# Altium PCB EQF1248.PcbDoc
Units mil, origin at the board's own origin, x right, y up, seen from the top; angles counter-clockwise.
Board outline 2495 x 4497 mil, 2 copper layers (Top Layer, Bottom Layer); 93 components, 63 nets, 321 pads, 60 vias.
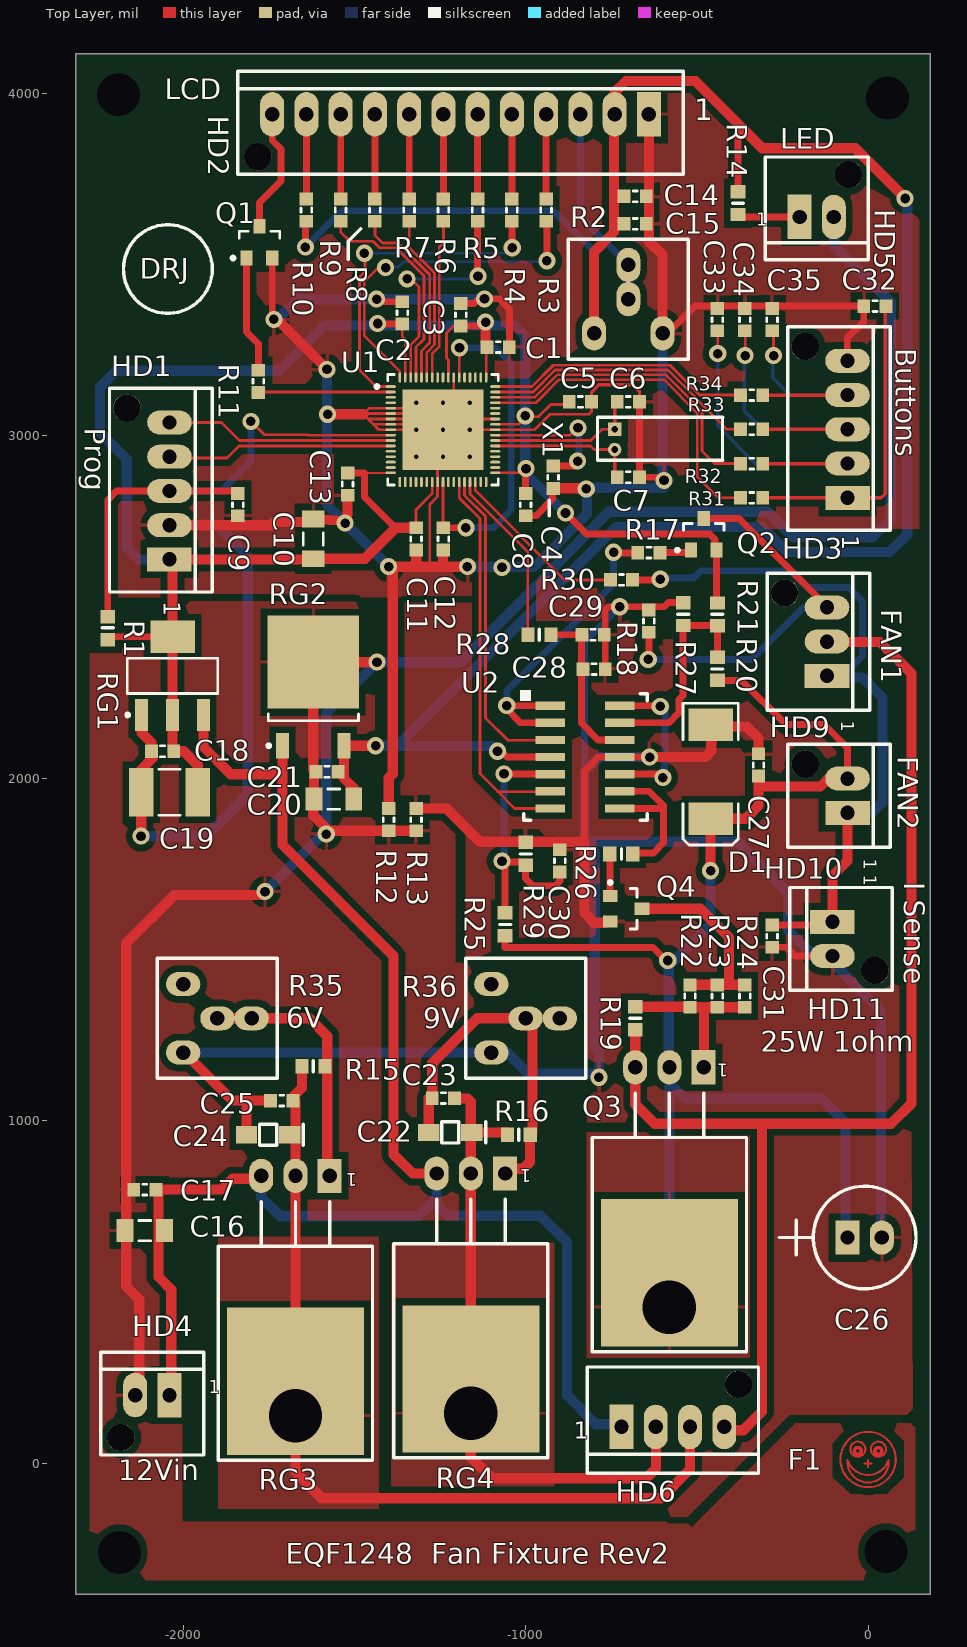
[diagram p0: Top Layer view]
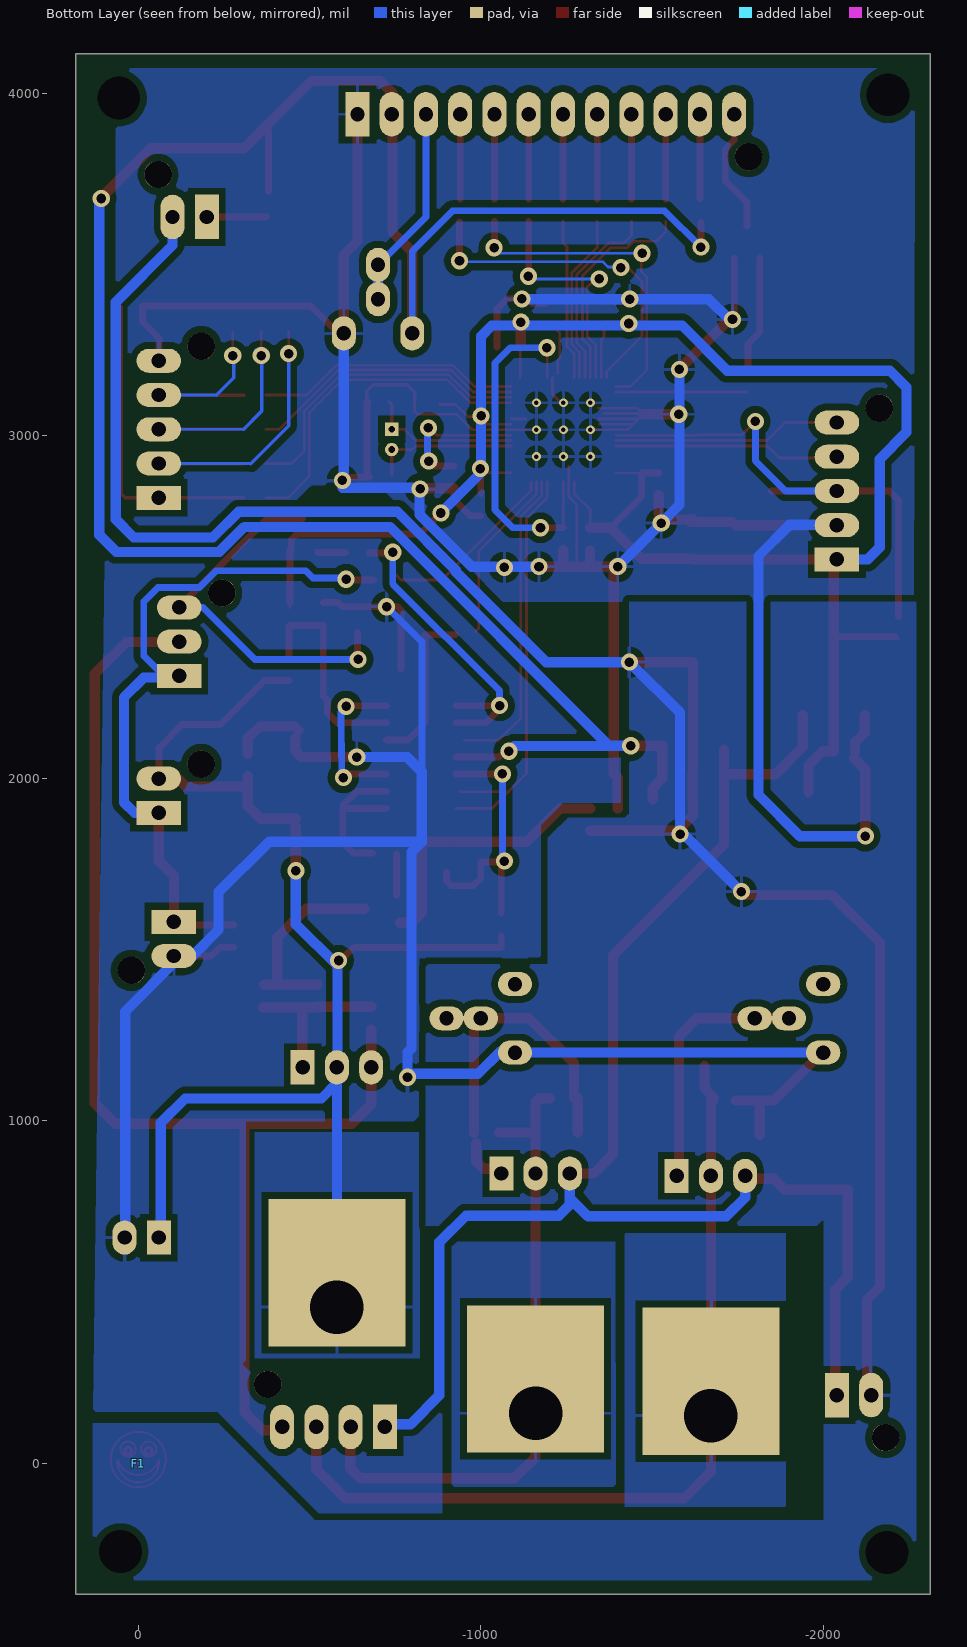
[diagram p1: Bottom Layer view, seen from below]

## Layer stack, top to bottom
Top Layer: signal copper 1.4
Dielectric: dielectric 12.6, FR-4, Dk 4.8
Bottom Layer: signal copper 1.4

## Board outline
-2313,4115 -2313,-382 182,-382 182,4115

## Design rules (kind name [scope] priority, off if disabled: settings)
Clearance [InNamedPolygon('TIP32') Or  InNamedPolygon('Fan_GND_Top') Or  InNamedPolygon('BottomGND') Or  InNamedPolygon('BottomCGND') Or  InNamedPolygon('TIP32Bottom') Or  InNamedPolygon('Bottom9V') Or  InNamedPolygon('Fan_GND_Bottom') Or  InNamedPolygon('Bottom6V') Or  InNamedPolygon('TopGND') Or  InNamedPolygon('TopCGND') Or  InNamedPolygon('Top9V') Or  InNamedPolygon('Top6V')] p1: gap=20
Clearance "Poly Clearance" [InNamedPolygon('TopFGND') Or  InNamedPolygon('Bottom6V') Or  InNamedPolygon('Bottom9V') Or  InNamedPolygon('TopGND') Or  InNamedPolygon('BottomCGND') Or  InNamedPolygon('TopCGND') Or  InNamedPolygon('BottomGND') Or  InNamedPolygon('Top6V') Or  InNamedPolygon('Top9V') Or  InNamedPolygon('BottomFGND')] p2: gap=15
Clearance Clearance_U1 [(InComponent('U1'))] p3: gap=6
Clearance "Clearance All" [All] p4: gap=6
HoleSize [All] p1: absolutevalues=TRUE maxlimit=160 minlimit=1 maxpercent=80.000 minpercent=20.000
PlaneConnect [All] p1: planeconnectstyle=Direct reliefexpansion=20 reliefentries=4 reliefconductorwidth=10 reliefairgap=10
PolygonConnect [All] p1: connectstyle=Relief reliefconductorwidth=10 reliefentries=4 polygonreliefangle="90 Angle"
RoomDefinition U_FanControl [InComponentClass('U_FanControl')] p1 off: confinementstyle=ConfineIn formatcopy=TRUE lockcomponents=FALSE outline -5320,-881 -3320,-881 -3320,119 -5320,119
RoomDefinition "U_Display Buttons" [InComponentClass('U_Display Buttons')] p2 off: confinementstyle=ConfineIn formatcopy=TRUE lockcomponents=FALSE outline -5320,-881 -3320,-881 -3320,119 -5320,119
RoomDefinition U_Cypress [InComponentClass('U_Cypress')] p3 off: confinementstyle=ConfineIn formatcopy=TRUE lockcomponents=FALSE outline -5320,-881 -3320,-881 -3320,119 -5320,119
RoutingVias [All] p1: holewidth=28 width=50 viastyle="Through Hole" minholewidth=28 minwidth=50 maxholewidth=28 maxwidth=50
SilkToSilkClearance [All] p1: silktosilkclearance=2
SilkscreenOverComponentPads [All] p1: minsilkscreentomaskgap=2
SolderMaskExpansion [All] p1: expansion=4
Width [All] p1: maxlimit=80 minlimit=6 preferedwidth=8 toplayer_maxwidth=50 bottomlayer_minwidth=8 minimp=50.000000 maximp=50.000000 favimp=50.000000
24 further rules are at their usual default settings.

## Classes and differential pairs
component class U_Cypress: C1 C2 C3 C4 C5 C6 C7 C8 C9 C10 C11 C12 C13 F1 HD1 R1 U1 X1
component class "U_Display Buttons": C14 C15 C32 C33 C34 C35 HD2 HD3 Q1 R2 R3 R4 R5 R6 R7 R8 R9 R10 R11 R12 R13 R31 R32 R33 R34
component class U_FanControl: C6 C16 C17 C18 C19 C20 C21 C22 C23 C24 C25 C27 C28 C29 C30 C31 D1 HD4 HD5 HD6 HD9 HD10 HD11 Q2 Q3 Q4 R14 R15 R16 R17 R18 R19 R20 R21 R22 R23 R24 R25 R26 R27 R28 R29 R30 R35 R36 RG1 RG2 RG3 RG4 U2

## Components (designator, comment, footprint, x,y, rotation, side; value= is the part's Value field where it differs from the comment)
C1 "CAP_NON_POLAR_SMT" 0603 -1080,3259 r0 top
C2 "CAP_NON_POLAR_SMT" 0603 -1360,3359 r90 top
C3 "CAP_NON_POLAR_SMT" 0603 -1189,3353.48 r90 top
C4 "1.0uF_0603_16V" 0603 -920,2879 r270 top
C5 "CAP_NON_POLAR_SMT" 0603 -840,3099 r0 top
C6 "22pF_0603" 0603 -700,3099 r0 top
C7 "22pF_0603" 0603 -700,2879 r0 top
C8 "CAP_NON_POLAR_SMT" 0603 -1000,2799 r270 top
C9 "CAP_NON_POLAR_SMT" 0603 -1840,2799 r270 top
C10 "CAP_NON_POLAR_SMT" 1206 -1620,2699 r90 top
C11 "CAP_NON_POLAR_SMT" 0603 -1320,2699 r270 top
C12 "1.0uF_0603_16V" 0603 -1240,2699 r270 top
C13 "CAP_NON_POLAR_SMT" 0603 -1520,2859 r270 top
C14 "CAP_NON_POLAR_SMT" 0603 -680,3699 r0 top
C15 "1.0uF_0603_16V" 0603 -680,3619 r0 top
C16 "CAP_NON_POLAR_SMT" 1206 -2112,679 r180 top
C17 "CAP_NON_POLAR_SMT" 0603 -2112,799 r180 top
C18 "CAP_NON_POLAR_SMT" 0603 -2060,2079 r180 top
C19 "CAP_NON_POLAR_SMT" 1812 -2040,1959 r180 top
C20 "CAP_NON_POLAR_SMT" 1206 -1560,1939 r180 top
C21 "CAP_NON_POLAR_SMT" 0603 -1580,2019 r180 top
C22 "10UF_TANT_16V" EIA3216-18 -1220,966 r180 top
C23 "CAP_NON_POLAR_SMT" 0603 -1240,1066 r180 top
C24 "10UF_TANT_16V" EIA3216-18 -1752,959 r180 top
C25 "CAP_NON_POLAR_SMT" 0603 -1712,1059 r180 top
C26 "100UF_RP_35V_100" CAP_100RP42 -60,659 r0 top
C27 "CAP_NON_POLAR_SMT" 0603 -320,2039 r90 top
C28 "CAP_NON_POLAR_SMT" 0603 -800,2319 r0 top
C29 "1.0uF_0603_16V" 0603 -803,2419 r0 top
C30 "CAP_NON_POLAR_SMT" 0603 -900,1759 r90 top
C31 "1.0uF_0603_16V" 0603 -280,1539 r270 top
C32 "CAP_NON_POLAR_SMT" 0603 20,3379 r180 top
C33 "CAP_NON_POLAR_SMT" 0603 -440,3339 r90 top
C34 "CAP_NON_POLAR_SMT" 0603 -360,3339 r90 top
C35 "CAP_NON_POLAR_SMT" 0603 -280,3339 r90 top
D1 "1N4001" DSO-C2/X3.3 -460,2019 r270 top
F1 "FIDUCIAL_SMILEY" FIDUCIAL_SMILEY 0,-1 r180 bottom
HD1 "HDR5PIN100SHRD" HDR5PIN100SHRD -2040,2639 r90 top
HD2 "HDR12PIN100SHRD" HDR12PIN100SHRD -640,3939 r180 top
HD3 "HDR5PIN100SHRD" HDR5PIN100SHRD -60,2819 r90 top
HD4 "HDR2PIN100SHRD" HDR2PIN100SHRD -2040,199 r180 top
HD5 "HDR2PIN100SHRD" HDR2PIN100SHRD -200,3639 r0 top
HD6 "HDR4PIN100SHRD" HDR4PIN100SHRD -720,106 r0 top
HD9 "HDR3PIN100SHRD" HDR3PIN100SHRD -120,2299 r90 top
HD10 "HDR2PIN100SHRD" HDR2PIN100SHRD -60,1899 r90 top
HD11 "HDR2PIN100SHRD" HDR2PIN100SHRD -104,1581 r270 top
Q1 "NPN_TRANSISTOR" SOT23-3 -1814.8,3519 r90 top
Q2 "PNP_TRANSISTOR" SOT23-3 -517.4,2666.09 r90 top
Q3 "TIP32" TO-220-NORMAL -480,1156 r180 top
Q4 "2N4401_SOT23" SOT23-3 -752.91,1656.4 r0 top
R1 "R0603REFLOW_5%_1/8WATT" RC0603REFLOW-IPC -2220,2439 r270 top
R2 "POT 6MM 10K" "6MM POT" -800,3299 r0 top
R3 "Resistor_0603_5%" 0603 -940,3659 r90 top
R4 "Resistor_0603_5%" 0603 -1040,3659 r90 top
R5 "Resistor_0603_5%" 0603 -1140,3659 r90 top
R6 "Resistor_0603_5%" 0603 -1240,3659 r90 top
R7 "Resistor_0603_5%" 0603 -1340,3659 r90 top
R8 "Resistor_0603_5%" 0603 -1440,3659 r90 top
R9 "Resistor_0603_5%" 0603 -1540,3659 r90 top
R10 "Resistor_0603_5%" 0603 -1640,3659 r90 top
R11 "Resistor_0603_5%" 0603 -1780,3159 r90 top
R12 "Resistor_0603_5%" 0603 -1400,1879 r90 top
R13 "Resistor_0603_5%" 0603 -1320,1879 r270 top
R14 "R0603REFLOW_5%" RC0603REFLOW-IPC -380,3679 r90 top
R15 "R0603REFLOW_5%" RC0603REFLOW-IPC -1620,1159 r0 top
R16 "R0603REFLOW_5%" RC0603REFLOW-IPC -1020,959 r0 top
R17 "Resistor_0603_5%" 0603 -640,2659 r0 top
R18 "Resistor_0603_5%" 0603 -640,2459 r90 top
R19 "R0603REFLOW_5%" RC0603REFLOW-IPC -680,1299 r90 top
R20 "R0603REFLOW_5%" RC0603REFLOW-IPC -440,2319 r90 top
R21 "R0603REFLOW_5%" RC0603REFLOW-IPC -440,2479 r270 top
R22 "Resistor_0603_1%" 0603 -520,1364 r90 top
R23 "Resistor_0603_1%" 0603 -440,1364 r90 top
R24 "Resistor_0603_1%" 0603 -360,1364 r90 top
R25 "R0603REFLOW_5%" RC0603REFLOW-IPC -1060,1573 r90 top
R26 "R0603REFLOW_5%" RC0603REFLOW-IPC -720,1779 r180 top
R27 "R0603REFLOW_5%" RC0603REFLOW-IPC -540,2479 r90 top
R28 "R0603REFLOW_5%" RC0603REFLOW-IPC -960,2419 r0 top
R29 "R0603REFLOW_5%" RC0603REFLOW-IPC -1000,1779 r90 top
R30 "Resistor_0603_5%" 0603 -720,2579 r0 top
R31 "Resistor_0603_5%" 0603 -340,2819 r0 top
R32 "Resistor_0603_5%" 0603 -340,2919 r0 top
R33 "Resistor_0603_5%" 0603 -340,3019 r0 top
R34 "Resistor_0603_5%" 0603 -340,3119 r0 top
R35 "POT 6MM 10K" "6MM POT" -2000,1399 r270 top
R36 "POT 6MM 10K" "6MM POT" -1100,1399 r270 top
RG1 "LM1117SPX-3.3_SOT223" SOT-223 -2031,2299 r90 top
RG2 "REGULATOR_DPAK" DPAK -1709.76,2094.91 r90 top
RG3 "LM1085_TO220" TO-220-NORMAL -1572,839 r180 top
RG4 "LM1085_TO220" TO-220-NORMAL -1060,846 r180 top
U1 "CY8C3246LTI-128 QFN68" QFN68_8x8-MD -1241.26,3017.74 r0 top
U2 "LM324_SOIC14" SOIC14REFLOW-IPC -825,2062 r270 top
X1 "32.768KHZ_CRYSTAL" .03_Small_Footprint_CRYSTAL -740,3019 r270 top

## Footprints (in the part's own frame and the unit in brackets; to place one, negate y for a bottom-side part, rotate by r counter-clockwise, add the part's x,y. Pads: shape width x height; smd on the part's side, far side on the other; paste and mask are expansions set on the pad)
"6MM POT" [mil]
  oval 70x100 hole 42: 1(0,0) 2(100,100) 3(100,200) 4(200,0)
  silkscreen extent -75,-75 275,275
0603 [mm] "Chip Resistor, 2-Leads, Body 1.6x0.8mm, IPC Medium Density"
  rect 0.95x1 smd: 1(-0.825,0) 2(0.825,0)
  silkscreen extent -0.15,-0.4 0.15,0.4
1206 [mm] "Chip Resistor, 2-Leads, Body 3.1x1.6mm, IPC Medium Density"
  rect 1.25x1.7 smd: 1(-1.475,0) 2(1.475,0)
  silkscreen extent -0.45,-0.75 0.45,0.75, body extent -1.63,-0.82 1.62,0.82, height 0.7
1812 [mm] "Chip Capacitor, 2-Leads, Body 4.5x3.2mm, IPC Low Density"
  rect 1.8x3.6 smd: 1(-2.1,0) 2(2.1,0)
  silkscreen extent -0.8,-1.7 0.8,1.7
.03_Small_Footprint_CRYSTAL [mm] "Small Footprint_ECS-.327-12.5-13"
  rect 1x1 hole 0.5: 1(0,0)
  round 1 hole 0.5: 2(1.5,0)
  silkscreen extent -0.89,-1.27 2.29,8, body extent -0.38,-0.35 1.71,7.67, height 2.1
CAP_100RP42 [mil]
  rect 70x100 hole 42: 1(0,0)
  oval 70x100 hole 42: 2(100,0)
  silkscreen extent -200,-150 200,150
DPAK [mm] "D-PAK, 3-Pads, Body 6.2x6.7mm (max), IPC Medium Density"
  rect 1.9x0.95 smd: 1(0,0) 3(0,-4.56)
  rect 6.9x6.8 smd: 4(6.2,-2.28)
  silkscreen extent -0.12,-5.63 2.35,1.15, body extent -0.42,-5.56 9.52,0.98, height 2.28
DSO-C2/X3.3 [mm] "DO-214-AB/SMC; 2 C-Bend Leads; Body 7.9 x 5.9 mm, inc. leads (LxW)"
  rect 2.4x3.3 smd: 1(-3.475,0) 2(3.475,0)
  silkscreen extent -5.07,-2.05 5.43,2.05
EIA3216-18 [mil]
  rect 62x50 smd: 1(-63,0) 2(63,0)
  silkscreen extent -103,-31 25,31
FIDUCIAL_SMILEY [mil]
  Bottom Layer circle w6: c-30,42 r22
  Bottom Layer circle w10: c-30,37 r10
  Bottom Layer circle w6: c30,42 r22
  Bottom Layer circle w10: c30,37 r10
  Bottom Layer circle w6: c0,12 r80.71
  Bottom Layer pour cut-out: -60,110 -105,65 -105,-40 -55,-90 50,-90 105,-40 105,60 55,110
  Bottom Layer lines w6: 10,0 -10,0 ; 0,-10 0,10 ; 60,10 cw(c0,30) -60,10 ccw(c0,5) 60,10
HDR2PIN100SHRD [mil]
  rect 70x130 hole 42: 1(0,0)
  oval 70x130 hole 42: 2(100,0)
  round 80 hole 80 unplated: 3(142,124)
  silkscreen extent -100,-125 200,175, body extent -92,-133 192,180, height 400
HDR3PIN100SHRD [mil]
  rect 70x130 hole 42: 1(0,0)
  oval 70x130 hole 42: 2(100,0) 3(200,0)
  round 80 hole 80 unplated: 4(242,124)
  silkscreen extent -100,-125 300,175, body extent -92,-138 292,175, height 400
HDR4PIN100SHRD [mil]
  rect 70x130 hole 42: 1(0,0)
  oval 70x130 hole 42: 2(100,0) 3(200,0) 4(300,0)
  round 80 hole 80 unplated: 5(342,124)
  silkscreen extent -100,-135 400,175, body extent -95,-138 390,175, height 400
HDR5PIN100SHRD [mil]
  rect 70x130 hole 42: 1(0,0)
  oval 70x130 hole 42: 2(100,0) 3(200,0) 4(300,0) 5(400,0)
  round 80 hole 80 unplated: 6(442,124)
  silkscreen extent -95,-125 500,175, body extent -92,-138 492,175, height 400
HDR12PIN100SHRD [mil]
  rect 70x130 hole 42: 1(0,0)
  oval 70x130 hole 42: 2(100,0) 3(200,0) 4(300,0) 5(400,0) 6(500,0) 7(600,0) 8(700,0) 9(800,0) 10(900,0) 11(1000,0) 12(1100,0)
  round 80 hole 80 unplated: 13(1142,124)
  silkscreen extent -100,-125 1200,175, body extent -92,-133 1192,180, height 400
QFN68_8x8-MD [mm] "QFN, 68-Leads, Body 8.1x8.1mm (max), Pitch 0.40mm, Medium Density"
  oval 0.75x0.2 smd: 1(-3.875,3.2) 2(-3.875,2.8) 3(-3.875,2.4) 4(-3.875,2) 5(-3.875,1.6) 6(-3.875,1.2) 7(-3.875,0.8) 8(-3.875,0.4) 9(-3.875,0) 10(-3.875,-0.4) 11(-3.875,-0.8) 12(-3.875,-1.2) 13(-3.875,-1.6) 14(-3.875,-2) 15(-3.875,-2.4) 16(-3.875,-2.8) 17(-3.875,-3.2) 35(3.875,-3.2) 36(3.875,-2.8) 37(3.875,-2.4) 38(3.875,-2) 39(3.875,-1.6) 40(3.875,-1.2) 41(3.875,-0.8) 42(3.875,-0.4) 43(3.875,0) 44(3.875,0.4) 45(3.875,0.8) 46(3.875,1.2) 47(3.875,1.6) 48(3.875,2) 49(3.875,2.4) 50(3.875,2.8) 51(3.875,3.2)
  oval 0.2x0.75 smd: 18(-3.2,-3.875) 19(-2.8,-3.875) 20(-2.4,-3.875) 21(-2,-3.875) 22(-1.6,-3.875) 23(-1.2,-3.875) 24(-0.8,-3.875) 25(-0.4,-3.875) 26(0,-3.875) 27(0.4,-3.875) 28(0.8,-3.875) 29(1.2,-3.875) 30(1.6,-3.875) 31(2,-3.875) 32(2.4,-3.875) 33(2.8,-3.875) 34(3.2,-3.875) 52(3.2,3.875) 53(2.8,3.875) 54(2.4,3.875) 55(2,3.875) 56(1.6,3.875) 57(1.2,3.875) 58(0.8,3.875) 59(0.4,3.875) 60(0,3.875) 61(-0.4,3.875) 62(-0.8,3.875) 63(-1.2,3.875) 64(-1.6,3.875) 65(-2,3.875) 66(-2.4,3.875) 67(-2.8,3.875) 68(-3.2,3.875)
  rect 2x2 smd paste-0.15 mask-0.15: 69(-2,-2) 69(-2,0) 69(-2,2) 69(0,-2) 69(0,0) 69(0,2) 69(2,-2) 69(2,0) 69(2,2)
  silkscreen extent -5.02,-4.1 4.1,4.1, body extent -4.05,-4.05 4.05,4.05, height 1
RC0603REFLOW-IPC [mil]
  rect 39x43 smd: 1(-33,0) 2(34,0)
  silkscreen extent 0,-16 0,16
SOIC14REFLOW-IPC [mil]
  rect 24x87 smd: 1(-150,-103) 2(-100,-103) 3(-50,-103) 4(0,-103) 5(50,-103) 6(100,-103) 7(150,-103) 8(150,100) 9(100,100) 10(50,100) 11(0,100) 12(-50,100) 13(-100,100) 14(-150,100)
  silkscreen extent -195,-190 185,180
SOT23-3 [mm] "SOT23, 3-Leads, Body 3.0x2.8mm (max), Pitch 0.95mm, IPC Medium Density"
  rect 1.1x0.9 smd: 1(0,0) 2(0,-1.9) 3(2.36,-0.95)
  silkscreen extent -0.12,-2.45 1.98,1.12, body extent 0.38,-2.47 1.98,0.57, height 1.4
SOT-223 [mm] "SOT223, 4-Leads, Body 6.7x7.3mm (max), Pitch 2.30mm, IPC Medium Density"
  rect 2.4x0.95 smd: 1(-2.9,2.3) 2(-2.9,0) 3(-2.9,-2.3)
  rect 2.4x3.3 smd: 4(2.9,0)
  silkscreen extent -3.02,-3.35 1.3,3.45, body extent -1.85,-3.35 1.85,3.35, height 1.8
TO-220-NORMAL [mil]
  rect 70x100 hole 42: 1(0,0)
  oval 70x100 hole 42: 2(100,0) 3(200,0)
  rect 400x430 hole 156 copper offset 0,-100: 4(100,700)
  silkscreen extent -125,75 325,830

## Part data
C1 C2 C3 C5 C8 C9 C11 C13 C14 C17 C18 C21 C23 C25 C27 C28 C30 C32 C33 C34 C35: library part 264790, "Capacitor, 0.1uF, 50V, Ceramic, X7R, +/- 20%, Non-Polar, 0603, Kemet: C0603C104M5RACTU or equivalent"
C4 C12 C15 C29 C31: library part 18838, "Capacitor, 1uF, 16V, Ceramic, X5R, +/- 10%, Non-Polar, 0603, 2, MURATA: GRM188R61C105KA93D OR EQUIVALENT"
C6 C7: library part 19574, "Capacitor, 22pF, 50, Ceramic, NPO, +/-5%, Non-Polar, 0603, 2, Kemet:C0603C220J5GACTU or equivalent"
C10 C16 C20: library part 265299, "Capacitor, 10uF, 50V, Ceramic, X5R, +/- 20%, Non-Polar, 1206, Taiyo Yuden: UMK316BBJ106ML-T or equivalent"
C19: library part 265012, "Capacitor, 1uF, 50V, Ceramic, Z5U, +/- 20%, Non-Polar, 1812, Kemet: C1812C105M5UACTU or equivalent"
C22 C24: library part 10669, "Capacitor, 10uF, 16V, Tantalum, General Purpose, +/- 20%, Polar, EIA 3216-18, KEMET: T491A106M016AS or Exact Equivalent"
C26: library part 3428, "Capacitor, 100uF, 35V, Electrolytic, +/- 20%, Radial, Polar, 0.1 in., Nichicon: UVR1V101MED or Equivalent"
D1: library part Diode, "Default Diode"
F1: library part 264290, "Fiducial, Smiley, PCB reference point, not a component"
HD1 HD3: library part 1770, "Header, 0.100 in., 5 pin Pins, Shrouded, AMP: 644486-5"
HD2: library part 1763, "Header, 0.1 in., 12 pins Pins, Shrouded, AMP: 1-64486-2"
HD4 HD5 HD10 HD11: library part 1766, "Header, 0.100 in., 2 Pins, Shrouded, AMP: 644486-2"
HD6: library part 1768, "Header, 0.100 in., 4 pin Pins, Shrouded, AMP: 644486-4"
HD9: library part 1767, "Header, 0.100 in., 3 pin Pins, Shrouded, AMP: 644486-3"
Q1: library part 265442, "Transistor, MMBT4401, 40V, SOT23-3, 500mA, NPN, Transistor, On Semi: MMBT4401LT1"
Q2: library part 18850, "Transistor, MMBT4403, 40V, SOT23-3, PNP, Transistor, On Semi: MMBT4403LT1"
Q3: library part 2637, "Transistor, TIP32, 40V, TO-220, 3A, PNP, Any"
Q4: library part 18848, "Transistor, MMBT4401, 40V, SOT23, 500mA, 3, NPN, Transistor, On Semi: MMBT4401LT1"
R1: library part 15593, "Resistor, 18, ThickFilm, 5%, 0603, 1/8W, Any"
R2 R35 R36: library part 6440, "Resistor, 10K, Carbon, 20%, 0.2 in X 0.1 in or 0.2 in X 0.2 in, 0.1W, Panasonic: EVN-D8AA03B14"
R3 R4 R5 R6 R7 R8 R9 R10 R11 R17 R18 R30: library part 18857, "Resistor, 10K, ThickFilm, 5%, 0603, 1/10W, 2, Any"
R12 R13: library part 18844, "Resistor, 0, ThickFilm, 5%, 0603, 1/10W, 2, Any"
R14: library part 2403, "Resistor, 130, ThickFilm, 5%, 0603, 1/10W, Any"
R15 R16: library part 5495, "Resistor, 120, ThickFilm, 5%, 0603, 1/10W, Any"
R19 R29: library part 2046, "Resistor, 100K, ThickFilm, 5%, 0603, 1/10W, Any"
R20: library part 2157, "Resistor, 15K, ThickFilm, 5%, 0603, 1/10W, Any"
R21: library part 5186, "Resistor, 330K, ThickFilm, 5%, 0603, 1/10W, Any"
R22 R23 R24: library part 20273, "Resistor, 750, 1%, 0603, 1/10W, 2, Any"
R25: library part 14583, "Resistor, 270K, ThickFilm, 5%, 0603, 1/10W, Any"
R26: library part 2071, "Resistor, 4.7K, ThickFilm, 5%, 0603, 1/10W, Any"
R27: library part 6345, "Resistor, 7.5K, ThickFilm, 5%, 0603, 1/10W, Any"
R28: library part 2052, "Resistor, 1M, ThickFilm, 5%, 0603, 1/10W, Any"
R31 R32 R33 R34: library part 18852, "Resistor, 100, ThickFilm, 5%, 0603, 1/10W, 2, Any"
RG1: library part 18870, "Regulator, LM1117MPX-3.3, 3.3V, SOT223, 800mA, 4, LDO, National: LM117MPX-3.3"
RG2: library part 265303, "Regulator, L78M05CDT-TR, 5V, DPAK, 500mA, Linear, ST: L78M05CDT-TR or equivalent"
RG3 RG4: library part 283929, "Regulator, LM1085, Adjustable, TO-220, 3A, LDO, Texas Instruments"
U1: library part "CY8C3xxxLTx-xxx QFN68", "CY8C3xxxLTx-xxx 68 pin QFN"
U2: library part 1795, "IC, LM324, SOIC, 14 pin, Op-Amp, National Semiconductor"
X1: library part 19127, "Xtal, 0.7 mm, Cylinder, 2, Crystal, 32.768KHz, ECS: ECS-.327-12.5-13;Alternates require approval"

## Free pads (board coordinates)
  round 60 hole 125 unplated mask+52.5: 0(-2189,3996) 0(-2186,-261) 0(52,-258) 0(57,3986)

## Via types
v1: diameter 50, hole 28, Top Layer to Bottom Layer, 51 vias
v2: diameter 25.98, hole 12.99, Top Layer to Bottom Layer, tented top, 9 vias

## Nets (pads, with @x,y where several pads share a name; then routed paths per layer and width w, separated by ;. In a path a pad name is that pad's centre, name@x,y a point inside that pad or via, vN(x,y) a via of type N, cw(c..) or ccw(c..) an arc to the next point about the centre after c; other vN are vias at no path point)
3.3V: C1.1 C2.1 C3.1 C5.1 C8.1 C10.1 C11.1 C13.1 C18.1 C19.1 HD1.1 Q2.2 R1.2 R21.1 RG1.2 RG1.4 U1.17 U1.24 U1.35 U1.44 U1.52 U1.59 U1.67 | length 6369.3
  Top Layer w8: R1.2 R1.2@-2211.83,2413.17 ; HD1.1@-2031,2641.17 HD1.1@-2025.53,2639 ; -1470,2891 U1.17 ; v1(-1432,3328) v1@-1430.52,3326.52 ; C2.1@-1360,3318 -1360,3289 -1351.5,3280.5 U1.67 ; C11.1 -1320,2784 -1272.76,2831.24 U1.24 ; U1.59@-1225,3181 -1225,3221 -1231,3227 -1231,3300 -1210,3321 C3.1 ; U1.52 C1.1@-1115.28,3245.72 ; U1.35 v1@-1000,2891.76 ; U1.44 -1020.26,3033.49 -1008,3045.74 -988.74,3045.74 -978.49,3056 -962,3056 -926.52,3091.48 C5.1@-880,3091.48 ; R21.1@-442.6,2499 R21.1@-442.6,2512
  Top Layer w20: R1.2@-2211.83,2413.17 RG1.4 ; C13.1 -1470,2891 -1470,2821.96 -1379.52,2731.48 ; v1@-1430.52,3326.52 C2.1 ; C3.1 v1@-1121,3321 ; C8.1 v1@-1000,2891.76 ; v1(-883.5,2774.5) -822,2713 -463,2713 -446.84,2696.84 Q2.2@-446.84,2666.09 ; R21.1@-442.6,2512 Q2.2
  Top Layer w30: HD1.1 HD1.1@-2031,2639 ; C18.1@-2031,2079 RG1.2 ; RG1.2@-2031,2165 RG1.2 ; HD1.1@-2031,2641.17 HD1.1@-2031,2639 ; C18.1 -1998,2079 -1957.32,2038.32 C19.1 ; C10.1@-1621.93,2639 -2025.53,2639 HD1.1@-2031,2639 ; C10.1 -1470.07,2640.93 -1379.52,2731.48 C11.1 ; C1.1@-1117,3263.52 v1(-1117,3332) ; RG1.2 RG1.4 HD1.1@-2031,2639
  Bottom Layer w8: v1@-1001,2906 v1(-999,2904) v1@-999,2890
  Bottom Layer w30: HD1.1 -2130,2639 -2165,2674 -2165,2932 -2243,3010 -2243,3142 -2195,3190 -1720,3190 -1588,3322 -1032,3322 -1001,3291 v1(-1001,3058) v1@-1001,2906 ; v1@-999,2890 v1(-883.5,2774.5)
5V: C14.1 C15.1 C20.1 C21.1 HD2.2 R2.1 R10.1 R14.2 RG2.3 U2.4 | length 6612.7
  Top Layer w8: R10.1@-1642.93,3623.07 R10.1@-1640,3626 ; RG2.3 RG2.3@-1530.14,2095 ; -380.91,3911.91 -380,3911
  Top Layer w20: v1(-1642.93,3551.07) R10.1@-1642.93,3623.07 ; v1@-1076.5,2084.5 -1054,2062 U2.4 ; R14.2 -380,3911
  Top Layer w30: RG2.3 -1530.24,1999.24 -1501.93,1970.93 C20.1 ; RG2.3@-1530.14,2095 v1(-1438,2095) ; R2.1@-800,3339 -800,3537 -742,3595 -742,3872 ; HD2.2@-740,3919 HD2.2 -740,4003 -707,4036 -505,4036 -380.91,3911.91 ; -380,3911 -309,3840 -37,3840 v1@109,3694
  Bottom Layer w8: v1@-1648,3546 v1(-1642.93,3551.07)
  Bottom Layer w20: v1(-1642.93,3551.07) -1537,3657 -918,3657 -800,3539 R2.1@-800,3339
  Bottom Layer w30: v1@-1436,2095 -1374,2095 -735,2734 -310,2734 -237,2661 64,2661 114,2711 v1@114,3696 ; -1379,2094 v1@-1097,2094
  other v1: -1082,2079 108,3693
6VDC: C24.1 C25.1 HD6.3 R15.1 RG3.2 RG3.4 | length 2516.7
  Top Layer w30: C25.1 -1679.52,1069.48 -1653,1096 R15.1 ; C25.1@-1672,1059 RG3.2 RG3.4 -1672,-25 -1595,-102 -604,-102 -520,-18 HD6.3@-520,85
9VDC: C22.1 C23.1 HD6.2 R16.1 RG4.2 RG4.4 | length 1858.4
  Top Layer w30: C23.1@-1202,1065 -1169,1065 -1160,1056 RG4.2 RG4.4 -1160,18 -1098,-44 -648,-44 -619,-15 HD6.2@-619,77 ; C22.1 R16.1@-1053,966
12VIN: C16.1 C17.1 HD4.1 HD6.1 RG1.3 RG2.1 RG3.3 RG4.3 | length 4509.2
  Top Layer w30: HD4.1@-2035,245 -2035,507 -2072,544 -2072,799 -1888,799 -1856,831 RG3.3@-1775,831 ; RG1.3 -1940.45,2091.45 -1861,2012 -1710,2012 ; RG2.1@-1710,2083 -1710,2012 ; RG4.3 -1330,846 -1386,902 -1386,1482 -1710,1806 -1710,2012
  Bottom Layer w30: RG3.3 -1772,776 -1717,721 -1313,721 -1267,767 ; RG4.3 -1260,755 -1228,723 -957,723 -879,645 -879,198 -795,114 -723,114 -731,106 HD6.1@-731,74
CGND: C1.2 C2.2 C3.2 C4.2 C5.2 C6.2 C7.2 C8.2 C9.2 C10.2 C11.2 C12.2 C13.2 C14.2 C15.2 C18.2 C19.2 C32.2 C33.2 C34.2 C35.2 HD1.2 HD2.1 HD3.5 Q1.2 R2.4 R12.2 RG1.1 U1.5 U1.6 U1.7 U1.8 U1.9 U1.25 U1.43 U1.45 U1.58 U1.69 | length 10164.9
  Top Layer w6: R2.4 R2.4@-585,3299
  Top Layer w8: v1(-1735,3340) v1@-1726,3340 ; v1@-1589,3194 v1(-1580,3194) ; U1.69@-1359,3064.98 U1.6 -1472.02,3064.98 ; U1.69@-1347,3033.49 U1.8 -1444.49,3033.49 ; U1.69@-1344,3049.24 U1.7 -1460.24,3049.24 ; U1.69@-1344,3080.73 U1.5 -1456.27,3080.73 -1472.02,3064.98 ; U1.69@-1336,3017.74 U1.9 -1428.74,3017.74 -1444.49,3033.49 ; -1280,2618 -1280,2800 -1257.01,2822.99 U1.25 U1.69@-1257.01,2911 ; v2(-1241.26,3096.48) -1234.09,3096.48 U1.69@-1211.57,3119 ; U1.69@-1209.76,3120.81 U1.58 ; v2(-1162.52,3017.74) U1.43 -974.26,3017.74 -929,3063 -815,3063 -807.52,3070.48 C5.2 ; U1.69@-1131.02,3049.24 U1.45 ; C4.2@-921,2845.52 C4.2 ; -1472.02,3064.98 -1474,3063 -1460.24,3049.24 ; -1460.24,3049.24 -1444.49,3033.49
  Top Layer w10: C5.2 -807.52,3127.48 -786,3149 -686,3149 -667.52,3130.52 C6.2 C6.2@-667.52,3085
  Top Layer w20: v1@-1740,3345 Q1.2 ; v1@-1427.48,3391.48 C2.2 ; C3.2 -1151.04,3385.96 v1@-1137,3400 ; v1@-1108,3400 -1077,3400 -1047,3370 C1.2@-1047,3259 ; C8.2 -969.48,2766.52 -921,2815 C4.2@-921,2845.52 ; C7.2@-676,2879 C7.2 ; C6.2@-671,3099 C6.2 C7.2 ; v1@-596,2879 C7.2 ; R2.4@-585,3299 -505,3379 C32.2 -12.48,3333.52 -61,3285 HD3.5@-61,3227
  Top Layer w30: v1@-2122.68,1839.32 C19.2 -2122.68,2025.32 -2090,2058 ; RG1.1 -2121.55,2132.55 -2092.48,2103.48 C18.2 ; HD1.2 -1744,2739 -1735,2748 C10.2@-1612,2748 ; v1@-1726,3340 v1(-1580,3194) ; C10.2 v1@-1526.61,2751.24 ; v1(-1578,3063) -1474,3063 -1489,3063 ; v1@-1522,2753 -1520,2780 C13.2 ; R12.2 -1400,2001 -1388,2013 v1@-1388,2618 ; v1(-1400,2618) v1@-1388,2618 ; C11.2@-1319,2665.52 -1319,2618 ; C12.2@-1241,2665.52 -1241,2618 ; v1(-1170,2618) -1241,2618 ; C4.2 v1@-823,2846.52 ; HD2.1@-640,3919 -640,3568 -600,3528 R2.4@-600,3339 ; v1@-1388,2618 -1319,2618 ; -1319,2618 -1280,2618 -1241,2618
  Bottom Layer w20: R2.4@-600,3292 R2.4@-590,3302
  Bottom Layer w30: v1(-2123,1831) -1932,1831 -1811,1952 -1811,2649 -1902,2740 HD1.2@-2006,2740 ; v1@-1725,3340 -1666,3399 v1(-1435,3399) v1@-1121,3399 ; v1(-1580,3194) -1580,2798 v1(-1527,2745) v1(-1400,2618) ; v1(-1170,2618) -974,2618 -821,2771 v1@-821,2843 ; v1@-816,2848 v1@-596,2848 ; v1@-600,2857 -600,3292 R2.4 ; R2.4@-592,3277 R2.4@-585,3284
  other v1: -1069,2616 -823,2845 -596,2870 -1120,3400
  other v2: -1320,2939 -1241.26,2939 -1162.52,2939 -1320,3017.74 -1241.26,3017.74 -1320,3096.48 -1162.52,3096.48
FAN_GND: C24.2 C25.2 C26.2 C27.2 C28.2 C29.2 C30.2 C31.2 D1.1 HD11.2 Q4.2 R13.1 R18.2 R27.2 R29.2 R35.4 R36.4 U2.11 | length 7281.5
  Top Layer w8: -1817,1059 -1815,1057 ; D1.1 D1.1@-455.19,2151
  Top Layer w20: -910,1815 -900,1815 ; -828,1815 -828,2021 -787,2062 U2.11 v1(-638,2062) ; C28.2 -767.52,2490.52 -757.04,2501 v1(-725,2501) -595,2501 -583,2513 R27.2 ; D1.1@-474,2141 D1.1@-463,2130 ; C31.2 -238.52,1506.52 -213,1481 HD11.2
  Top Layer w30: R35.4@-2008,1211 -1856,1059 -1817,1059 C25.2 ; C24.2 -1815,1057 ; R13.1 -1230.48,1911.48 -1134,1815 -910,1815 ; -900,1815 -839,1815 ; -828,1815 -828,1606.77 -799.23,1578 Q4.2@-763.91,1578 ; v1(-638,2062) -476,2062 -458,2080 D1.1@-458,2116 ; D1.1@-455.19,2151 -354,2151 -320,2117 C27.2
  Bottom Layer w20: -828,2019 -828,2398 v1(-725,2501)
  Bottom Layer w30: R35.4 R36.4 ; R36.4@-1102,1197 R36.4@-1091,1186 ; R36.4@-1057,1202 -992,1137 v1@-786,1137 ; v1@-786,1138 -786,1200 -798,1212 -798,1785 -828,1815 ; v1(-638,2062) -785,2062 -828,2019 -828,1815 ; HD11.2@-153,1476 -234,1557 -234,1667 -382,1815 -828,1815 ; HD11.2@-114,1471 38,1319 38,669 C26.2@46,661
  other v1: -786,1127
GND: C16.2 C17.2 C20.2 C21.2 HD4.2 HD5.2 R12.1 R13.2 RG2.4 | length 6198.5
  Top Layer w8: RG2.4 RG2.4@-1612.48,2331.48 ; C21.2@-1618.07,2013.41 C21.2
  Top Layer w30: HD4.2@-2128,236 -2128,478 -2166,516 -2166,1519 -2026,1659 v1@-1767,1659 ; C20.2@-1620,1939 -1620,1892 -1574.52,1846.52 R12.1 R13.2 ; C21.2@-1620,2026.52 RG2.4 v1(-1434,2339) ; C20.2 C21.2@-1618.07,2013.41
  Bottom Layer w30: v1(-1761,1669) v1@-1593,1837 ; v1(-1582,1837) -1582,2191 v1(-1434,2339) -1191.09,2339 -927,2603.09 ; -927,2608 -757,2778 -293,2778 -218,2703 13,2703 66,2756 66,3390 -100,3556 HD5.2
NetC4_1: C4.1 U1.42 | length 441.4
  Top Layer w8: U1.42 -870.01,3001.99 v1@-855,3017
  Top Layer w20: C4.1 v1@-857.52,2911.48
  Bottom Layer w8: v1@-858,2924 -848.48,2922.64 -844,2922 v1@-844,2926 ; v1(-847,3023) v1@-852,3023 ; v1@-844,3019 -848,3021 v1@-852,3023 ; v1@-852,3023 -855,3023 -858,3026 v1@-852,3023
  Bottom Layer w20: v1@-844,2926 v1@-844,3019
  other v1: -848,2926
NetC6_1: C6.1 U1.41 X1.1 | length 445.4
  Top Layer w8: U1.41 -809.76,2986.24 -777,3019 X1.1
  Top Layer w10: X1.1 -740,3091.48 C6.1
NetC7_1: C7.1 U1.40 X1.2 | length 426.5
  Top Layer w8: U1.40 -810.5,2970.5 -799.94,2959.94 X1.2
  Top Layer w10: C7.1@-740,2886.52 X1.2
NetC9_1: C9.1 HD1.3 R1.1 U1.10 | length 1538.5
  Top Layer w8: v1(-1802,3042) -1763,3003 -1635,3003 -1633.99,3001.99 U1.10
  Top Layer w20: R1.1 -2220,2813 -2194,2839 HD1.3 C9.1@-1847.52,2839
  Bottom Layer w20: HD1.3 -1890,2839 -1802,2927 v1(-1802,3042)
NetC12_1: C12.1 U1.26 U1.57 | length 1024.4
  Top Layer w8: C12.1@-1241.26,2731.48 U1.26 ; U1.57 v1@-1194.02,3243.02
  Top Layer w20: C12.1 v1(-1174.52,2731.48)
  Bottom Layer w20: v1(-1193,3257) -1086,3257 -1042,3213 -1042,2784 -1094.52,2731.48 v1(-1174.52,2731.48)
NetC22_2: C22.2 C23.2 R16.2 R36.2 R36.3 RG4.1 | length 1125.7
  Top Layer w6: R36.2 R36.3
  Top Layer w8: RG4.1 RG4.1@-1060,853
  Top Layer w30: C22.2 C23.2@-1283,1066 ; C23.2 -1272.48,1167.52 -1141,1299 R36.2 ; RG4.1@-1060,853 RG4.1@-1060,860 ; RG4.1@-1044,860 RG4.1@-1060,860 ; -987,934 -987,880 -1007,860 RG4.1@-1060,860 ; R16.2@-980,964 R36.2@-980,1296
NetC26_1: C26.1 C27.1 D1.2 HD10.2 Q3.2 Q3.4 R20.1 R25.1 | length 3944.6
  Top Layer w8: Q3.4@-580,466 Q3.4@-538,424 ; D1.2 D1.2@-456.81,1879 ; HD10.2@-108,2007 -68,2007 HD10.2
  Top Layer w20: R25.1 -1060,1506 -628,1506 v1@-595,1473 ; R20.1 -369,2286 -240,2157 -128,2157 -60,2089 HD10.2
  Top Layer w30: v1(-460,1730) D1.2@-460,1859 ; D1.2 -357.81,1882.19 -320,1920 C27.1 ; -304.48,1976 -139,1976 HD10.2@-108,2007
  Bottom Layer w30: Q3.2@-582,1177 -582,1452 -460,1574 v1(-460,1730) ; Q3.4 Q3.2@-580,1110 ; Q3.2@-580,1166 Q3.2 Q3.2@-580,1110 ; C26.1@-66,685 -66,994 -137,1065 -535,1065 Q3.2@-580,1110
  other v1: -585,1468
NetC28_1: C28.1 C29.1 R28.2 U2.12 | length 480.9
  Top Layer w8: C29.1@-837.2,2419 C29.1
  Top Layer w20: R28.2 -837.2,2419 -837.2,2161.2 -788,2112 U2.12
NetC30_1: C30.1 R25.2 R29.1 U2.5 | length 771.4
  Top Layer w20: R25.2 v1@-1060,1755 ; v1@-1059,1756 -1000,1756 R29.1 -1000,1708 -978,1686 -914,1686 -900,1700 C30.1 ; v1@-1054,2012 U2.5
  Bottom Layer w20: v1@-1063,1764 v1(-1063,2013)
  other v1: -1069,1758
NetC31_1: C31.1 HD9.1 HD10.1 HD11.1 R30.2 | length 2117.1
  Top Layer w8: HD9.1 HD9.1@-114,2305
  Top Layer w20: R30.2 v1@-607,2579 ; C31.1 HD11.1@-113.52,1571.48
  Top Layer w30: HD11.1 -104,1715 -60,1759 HD10.1
  Bottom Layer w8: v1@-603.5,2584.5 v1(-607,2581) ; HD10.1 HD10.1@0,1899 ; HD10.1@0,1882 HD10.1@0,1899 ; 11,1899 HD10.1@0,1899 ; v1(-607,2581) -607,2588 -610,2591 -610,2584 v1(-607,2581)
  Bottom Layer w20: v1@-594.5,2584.5 -509.5,2584.5 -488,2606 -228,2606 -179,2557 -57,2557 -16,2516 -16,2357 HD9.1@-75,2298
  Bottom Layer w30: HD9.1@-127,2294 -16,2294 42,2236 42,1930 11,1899
NetC32_1: C32.1 HD3.1 R31.2 | length 911.5
  Top Layer w6: C32.1@50,3376.52 C32.1
  Top Layer w10: R31.2 HD3.1 38,2819 50,2831 C32.1@50,3376.52
NetC33_1: C33.1 HD3.2 R32.2 | length 948.6
  Top Layer w8: v1(-439,3240) C33.1@-439,3305.52
  Top Layer w10: R32.2 HD3.2
  Bottom Layer w8: -329,2919 HD3.2
  Bottom Layer w10: v1(-439,3240) -439,3029 -329,2919
NetC34_1: C34.1 HD3.3 R33.2 | length 820.2
  Top Layer w8: v1(-359,3234) C34.1@-359,3305.52
  Top Layer w10: R33.2 HD3.3
  Bottom Layer w8: v1@-342.5,3234 v1@-342.5,3250.5 ; -307.52,3019 HD3.3
  Bottom Layer w10: v1@-361,3234 -361,3072.48 -307.52,3019
NetC35_1: C35.1 HD3.4 R34.2 | length 651.1
  Top Layer w8: v1(-276,3234) C35.1@-276,3302.52
  Top Layer w10: R34.2 HD3.4
  Bottom Layer w8: v1@-275,3255 -265,3245 v1@-265,3228 ; -228,3119 HD3.4
  Bottom Layer w10: v1@-265,3228 -279,3214 -279,3170 -228,3119
NetHD1_4: HD1.4 U1.12 | length 635.9
  Top Layer w8: HD1.4@-2015,2935 -1872,2935 -1836.5,2970.5 U1.12
NetHD1_5: HD1.5 U1.11 | length 668
  Top Layer w8: HD1.5 -1888,3039 -1835.24,2986.24 U1.11
NetHD2_3: HD2.3 R2.2 R2.3 | length 558
  Bottom Layer w20: HD2.3@-840,3919 -840,3639 R2.3
  Bottom Layer w30: R2.2@-700,3419 R2.3
NetHD2_4: HD2.4 R3.2 | length 227.5
  Top Layer w20: R3.2 HD2.4@-940,3919
NetHD2_5: HD2.5 R4.2 | length 227.5
  Top Layer w20: R4.2 HD2.5@-1040,3919
NetHD2_6: HD2.6 R5.2 | length 227.5
  Top Layer w20: R5.2 HD2.6@-1140,3919
NetHD2_7: HD2.7 R6.2 | length 227.5
  Top Layer w20: R6.2 HD2.7@-1240,3919
NetHD2_8: HD2.8 R7.2 | length 227.5
  Top Layer w20: R7.2 HD2.8@-1340,3919
NetHD2_9: HD2.9 R8.2 | length 227.5
  Top Layer w20: R8.2 HD2.9@-1440,3919
NetHD2_10: HD2.10 R9.2 | length 227.5
  Top Layer w20: R9.2 HD2.10@-1540,3919
NetHD2_11: HD2.11 R10.2 | length 226
  Top Layer w20: R10.2@-1640,3693 HD2.11@-1640,3919
NetHD2_12: HD2.12 Q1.3 | length 344.1
  Top Layer w20: Q1.3 -1777.4,3680.6 -1714,3744 -1714,3837 -1740,3863 HD2.12@-1740,3919
NetHD5_1: HD5.1 R14.1 | length 182.9
  Top Layer w6: R14.1 R14.1@-373,3639
  Top Layer w20: R14.1@-373,3639 HD5.1
NetHD6_4: HD6.4 HD9.2 Q3.3 R19.1 | length 3554.5
  Top Layer w30: R19.1 Q3.3 -680,1048 -623,991 67,991 127,1051 127,2305 34,2398 HD9.2@-87,2398 ; HD6.4 -410,96 -364,96 -310,150 -310,988
NetHD9_3: HD9.3 Q2.3 R18.1 | length 1109.9
  Top Layer w20: v1@-640,2359 R18.1@-640,2426 ; Q2.3 -377,2759 HD9.3@-126,2508
  Bottom Layer w20: v1(-642,2347) -341,2347 -189,2499 HD9.3
NetQ1_1: Q1.1 R11.2 | length 341.9
  Top Layer w20: Q1.1 -1814.8,3302.8 -1780,3268 R11.2
NetQ2_1: Q2.1 R17.2 | length 91.5
  Top Layer w8: Q2.1@-524.49,2659 Q2.1
  Top Layer w20: R17.2@-606,2659 Q2.1@-524.49,2659
NetQ3_1: Q3.1 R19.2 R22.1 R23.1 R24.1 | length 468.9
  Top Layer w30: R19.2 R22.1@-521.48,1333 ; R22.1@-526,1331.52 R22.1 R23.1 R24.1@-364,1331.52 ; Q3.1@-480,1166 -480,1189 -479,1190 -479,1314
NetQ4_1: Q4.1 R26.2 | length 123
  Top Layer w8: Q4.1@-754,1657.49 Q4.1
  Top Layer w20: Q4.1@-754,1657.49 R26.2
NetQ4_3: Q4.3 R22.2 R23.2 R24.2 | length 575.9
  Top Layer w20: R22.2@-526,1402.48 R22.2@-521,1397.48
  Top Layer w30: Q4.3 -490,1619 -406,1535 -406,1409 ; R22.2@-521,1397.48 R24.2@-367,1397.48
NetR3_1: R3.1 U1.68 | length 968.1
  Top Layer w8: v1@-1433,3488 -1471,3450 -1471,3292 -1367.24,3188.24 U1.68 ; R3.1 R3.1@-938,3624.52
  Top Layer w20: v1(-938,3511) R3.1@-938,3624.52
  Bottom Layer w8: v1(-1409,3491) -1407,3493 -1372,3493 -1357,3508 -952,3508 v1@-944,3500
NetR4_1: R4.1 U1.1 | length 961.7
  Top Layer w8: v1@-1469,3531 -1469,3480 -1485,3464 -1485,3192 -1436.72,3143.72 U1.1 ; v1@-1040,3550 v1(-1039,3549)
  Top Layer w20: v1@-1040,3550 R4.1
  Bottom Layer w8: v1(-1471,3533) v1@-1044,3533
NetR5_1: R5.1 U1.66 | length 671.2
  Top Layer w8: v1@-1336,3459 -1311,3434 -1311,3290 -1335.75,3265.25 U1.66 ; v1@-1140,3467 v1(-1139,3466)
  Top Layer w20: v1@-1140,3467 R5.1
  Bottom Layer w8: v1(-1346,3458) v1@-1145,3458
NetR6_1: R6.1 U1.62 | length 469.8
  Top Layer w8: U1.62 -1272.76,3239.65 -1252,3260.4 -1252,3552 -1240,3564 R6.1
NetR7_1: R7.1 U1.63 | length 496.2
  Top Layer w8: R7.1 -1340,3550 -1266,3476 -1266,3266.2 -1288.5,3243.7 U1.63
NetR8_1: R8.1 U1.64 | length 559
  Top Layer w8: R8.1 -1440,3585 -1418,3563 -1372.8,3563 -1280,3470.2 -1280,3272 -1304.25,3247.75 U1.64
NetR9_1: R9.1 U1.65 | length 634
  Top Layer w8: R9.1 -1540,3595 -1513,3568 -1446,3568 -1427,3549 -1378.6,3549 -1297,3467.4 -1297,3282 -1320,3259 U1.65
NetR11_1: R11.1 U1.2 | length 384.2
  Top Layer w8: R11.1@-1778.02,3127.98 U1.2
NetR15_2: R15.2 R35.2 R35.3 RG3.1 | length 725.5
  Top Layer w30: R35.2@-1904,1278 R35.2@-1900,1278 ; R35.2 R35.3 -1631,1299 -1579,1247 RG3.1@-1579,868
NetR17_1: R17.1 U2.1 U2.2 | length 902.8
  Top Layer w20: v1@-1063,2212 v1(-1055,2212) U2.1 ; v1@-1055,2202 -1015,2162 U2.2 ; v1@-722,2658 R17.1@-675,2658
  Bottom Layer w20: v1(-1055,2212) -1055,2256 -743,2568 v1(-743,2660)
NetR20_2: R20.2 R21.2 R27.1 U2.13 | length 635.4
  Top Layer w20: U2.13 -582,2162 -553,2191 -553,2229 -540,2242 R27.1 R21.2@-441,2446 ; R20.2 R21.2
NetR26_1: R26.1 U2.8 U2.9 | length 484.1
  Top Layer w8: R26.1 R26.1@-684,1782
  Top Layer w20: U2.8 -598,1912 ; U2.9 -639,1962 -597,1920 -597,1812 -627,1782 R26.1@-684,1782
NetR28_1: R28.1 U1.31 | length 510.7
  Top Layer w8: U1.31 -1162.52,2830.32 -994,2661.8 -994,2437 R28.1@-985,2428
NetR30_1: R30.1 U1.32 | length 533.9
  Top Layer w8: U1.32 -1146.77,2839.77 -886,2579 -767.48,2579 R30.1@-752.48,2594
NetR31_1: R31.1 U1.48 | length 996
  Top Layer w8: U1.48 -969.52,3096.48 -902,3164 -596,3164 -499,3067 -499,2881 -437,2819 R31.1
NetR32_1: R32.1 U1.49 | length 919.2
  Top Layer w8: U1.49 -973.57,3112.23 -907.8,3178 -590.2,3178 -485,3072.8 -485,2956 -448,2919 R32.1
NetR33_1: R33.1 U1.50 | length 814.4
  Top Layer w8: U1.50 -977.62,3127.98 -913.6,3192 -584.4,3192 -411.4,3019 R33.1
NetR34_1: R34.1 U1.51 | length 778.1
  Top Layer w8: U1.51 -981.67,3143.72 -919.4,3206 -578.6,3206 -491.6,3119 R34.1
NetU1_29: U1.29 U2.6 U2.7 | length 1266.3
  Top Layer w8: U1.29 -1194.02,2819.02 -1133.5,2758.5 -1133.5,2013.5 -1081,1961 ; U2.6@-939,1961 -1081,1961 ; U2.7 -1032,1912 -1081,1961
NetU1_30: U1.30 U2.3 | length 906.5
  Top Layer w8: U1.30 -1178.27,2826.27 -1117,2765 -1117,2176 -1052,2111 U2.3@-952,2111
NetU2_10: U2.10 U2.14 | length 448.4
  Top Layer w20: U2.10 v1@-606,2012 ; U2.14 v1@-615,2212
  Bottom Layer w20: v1@-594,2015 -591.48,2194.04 v1(-607,2210) -598,2210 -594,2214 v1@-593.84,2210.61
  other v1: -599,2002
pads on no net: HD1.6 HD2.13 HD3.6 HD4.3 HD5.3 HD6.5 HD9.4 HD10.3 HD11.3 R35.1 R36.1 U1.3 U1.4 U1.13 U1.14 U1.15 U1.16 U1.18 U1.19 U1.20 U1.21 U1.22 U1.23 U1.27 U1.28 U1.33 U1.34 U1.36 U1.37 U1.38 U1.39 U1.46 U1.47 U1.53 U1.54 U1.55 U1.56 U1.60 U1.61

## Polygon pours and split planes (outlines as drawn)
6VDC on Top Layer "Top6V" (solid, remove dead copper, pour order 1011): -1897,663 -1897,-133 -1429,-133 -1429,662
9VDC on Top Layer "Top9V" (solid, remove dead copper, pour order 1010): -1392,646 -1392,-65 -1390,-67 -1388,-69 -917,-69 -917,641 -920,644
CGND on Top Layer "TopCGND" (solid, remove dead copper, pour order 1009): -2268,4073 137,4073 149,4061 149,2728 -340,2728 -349,2719 -411,2781 -411,2836 -726,2836 -764,2798 -1034,2528 -2268,2528
GND on Top Layer "TopGND" (solid, remove dead copper, pour order 1008): -2272,2520 -2272,-341 -2276,-345 -2272,-341 137,-341 137,103 124,116 -212,116 -515,-187 -531,-171 -2002,-171 -2002,710 -843,710 -843,1437 -827,1453 -835,1461 -1205,1461 -1205,1844 -1246,1885 -1258,1897 -1441,1897 -1441,2491 -1466,2516
NetC26_1 on Top Layer "TIP32" (solid, remove dead copper, pour order 1000): -340,967 -340,308 -822,308 -822,967
FAN_GND on Top Layer "Fan_GND_Top" (solid, remove dead copper, pour order 1001): 131,146 127,142 -231,142 -231,139 -526,-156 -892,-156 -892,275 -899,282 -896,285 -310,285 -310,990 -311,991 -315,995 -820,995 -820,1474 -828,1482 -832,1478 -1175,1478 -1175,1837 -1179,1841 -1249.48,1911.48 -1266,1911.48 -1408.48,1911.48 -1413,1916 -1424,1927 -1424,2513 -1032,2513 -719,2826 -711,2826 -443,2826 -337,2720 -295,2720 112,2720 116,2724
CGND on Bottom Layer "BottomCGND" (solid, remove dead copper, pour order 1003): -2268,4073 66,4073 66,2732 58,2724 48,2734 -324,2734 -384,2734 -494,2844 -506,2856 -710,2856 -710,2848 -1034,2524 -1042,2516 -2264,2516
6VDC on Bottom Layer "Bottom6V" (solid, remove dead copper, pour order 1007): -1890,672 -1890,-125 -1891,-126 -1890,-127 -1420,-127 -1420,669 -1417,672
9VDC on Bottom Layer "Bottom9V" (solid, remove dead copper, pour order 1005): -1392,646 -1391,647 -916,647 -916,-70 -919,-73 -923,-69 -1394,-69
GND on Bottom Layer "BottomGND" (solid, remove dead copper, pour order 1002): -2272,2520 -2268,2516 -1433,2516 -1433,1897 -1429,1893 -1421,1885 -1254,1885 -1254,1884 -1209,1839 -1196,1826 -1196,1457 -847,1457 -843,1461 -839,1457 -839,693 -1981,693 -1998,710 -2002,706 -2002,-167 -516,-167 -503,-154 -233,116 -212,116 133,116 133,-333 125,-341 -2272,-341
NetC26_1 on Bottom Layer "TIP32Bottom" (solid, remove dead copper, pour order 1004): -340,967 -340,306 -822,306 -822,965 -824,967
FAN_GND on Bottom Layer "Fan_GND_Bottom" (solid, remove dead copper, pour order 1006): 131,150 -231,150 -529,-148 -529,-152 -889,-152 -892,-149 -888,-145 -888,270 -322,270 -303,289 -314,300 -314,999 -805,999 -816,1010 -820,1014 -820,1475 -1176,1475 -1179,1478 -1175,1482 -1175,1848 -1175,1863 -1232,1920 -1240,1928 -1409,1928 -1409,2509 -1405,2505 -1058,2505 -1032,2505 -718,2819 -711,2826 -499,2826 -499,2814 -477,2792 -307,2792 -291,2792 -216,2717 -212,2713 97,2713

## Silkscreen, mask and mechanical layers (free items; w line width, h text height)
Top Overlay:
  circle w10: c-2044.54,3487 r129.54
  lines w10: -1518,3515 -1518,3568 -1481,3605 ; -931,2766 -931,2812
  text "LCD" at -2054,3983 h60
  text "LED" at -257,3838 h60
  text "DRJ" at -2127,3458 h60
  text "Buttons" at 81,3255 h60 r270
  text "Prog" at -2288,3023 h60 r270
  text "FAN1" at 39,2493 h60 r270
  text "FAN2" at 86,2065 h60 r270
  text "I Sense" at 105,1697 h60 r270
  text "6V" at -1699,1272 h60
  text "9V" at -1299,1270 h60
  text "25W 1ohm" at -313,1201 h60
  text "12Vin" at -2190,-50 h60
  text "EQF1248  Fan Fixture Rev2" at -1700,-293 h60
  text "DRJ" at -2835,-1165 h60

## Text inside footprints (layer, text, board x,y; h text height)
HD1: Top Overlay "1" at -2057,2517 h50 r270
HD2: Top Overlay "1" at -508,3922 h62.5
HD3: Top Overlay "1" at -75,2710 h50 r270
HD4: Top Overlay "1" at -1925,204 h37.5
HD5: Top Overlay "1" at -327,3614 h37.5
HD6: Top Overlay "1" at -860,71 h50
HD9: Top Overlay "1" at -78,2168 h37.5 r270
HD10: Top Overlay "1" at -12,1765 h37.5 r270
HD11: Top Overlay "1" at -12,1718 h37.5 r270
Q3: Top Overlay "1" at -408,1167 h37.5 r180
RG3: Top Overlay "1" at -1492,847 h37.5 r180
RG4: Top Overlay "1" at -984,859 h37.5 r180